# Altium PCB slip-rings.PcbDoc
Units mm, origin at the board's own origin, x right, y up, seen from the top; angles counter-clockwise.
Board outline 13.3 x 13.3 mm, 2 copper layers (Top Layer, Bottom Layer); 3 components, 3 nets, 4 pads, 12 vias.
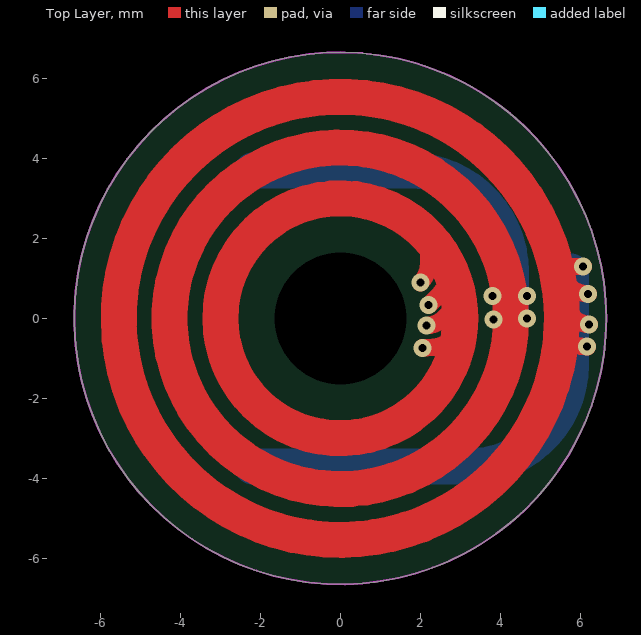
[diagram p0: Top Layer view]
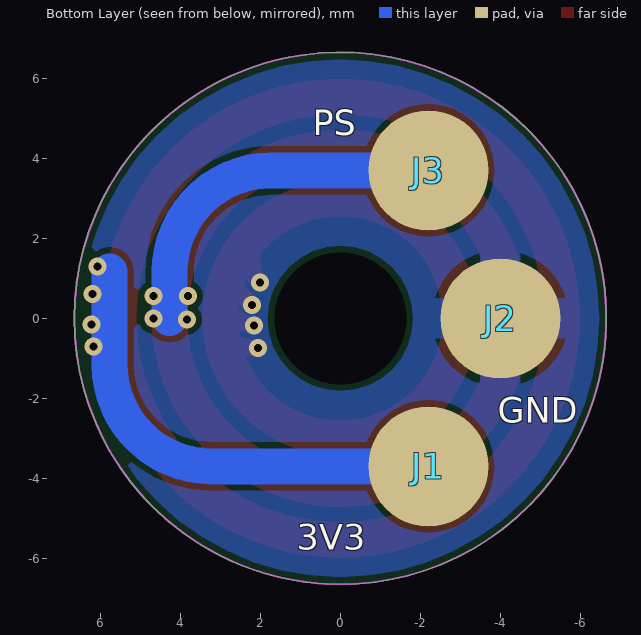
[diagram p1: Bottom Layer view, seen from below]

## Layer stack, top to bottom
Top Solder: solder mask 0.0102, Solder Resist, Dk 3.5
Top Layer: signal copper 0.0356
Dielectric 1: dielectric 0.32, FR-4, Dk 4.8
Bottom Layer: signal copper 0.0356
Bottom Solder: solder mask 0.0102, Solder Resist, Dk 3.5

## Board outline
-6.65,0 ccw(c0,0) 0,-6.65 ccw(c0,0) 6.65,0 ccw(c0,0) 0,6.65 ccw(c0,0)

## Design rules (kind name [scope] priority, off if disabled: settings)
Clearance [All] p1: gap=0.152 ignorepadtopadclearanceinfootprint=FALSE except(0: Arc-Hole Track-Hole SMDPad-Hole THPad-Hole Via-Hole Fill-Hole Poly-Hole Region-Hole Text-Hole)
HoleSize [All] p1: absolutevalues=TRUE maxlimit=25.4 minlimit=0.025 maxpercent=80.000 minpercent=20.000
MinimumSolderMaskSliver [All] p1 off: minsoldermaskwidth=0.254
PolygonConnect [All] p1: thpad.connectstyle=Direct thpad.reliefconductorwidth=0.254 thpad.reliefentries=4 thpad.polygonreliefangle="90 Angle" thpad.airgapwidth=0.254 smdpad.connectstyle=Relief smdpad.reliefconductorwidth=1.016 smdpad.reliefentries=4 smdpad.polygonreliefangle="90 Angle" smdpad.airgapwidth=0.203 via.connectstyle=Direct via.reliefconductorwidth=0.254 via.reliefentries=4 via.polygonreliefangle="90 Angle" via.airgapwidth=0.254
RoutingVias [All] p1: holewidth=0.711 width=1.27 viastyle="Through Hole" minholewidth=0.2 minwidth=0.45 maxholewidth=0.711 maxwidth=1.27
SilkToSilkClearance [All] p1 off: silktosilkclearance=0.254
SilkToSolderMaskClearance [IsPad] p1 off: minsilkscreentomaskgap=0.254 clearancetoexposedcopper=TRUE
SolderMaskExpansion [All] p1: expansion=0.102 istentingtop=FALSE
Width [All] p1: maxlimit=5.08 minlimit=0.152 preferedwidth=0.254 minimp=50.000000 maximp=50.000000 favimp=50.000000
26 further rules are at their usual default settings.

## Components (designator, comment, footprint, x,y, rotation, side; value= is the part's Value field where it differs from the comment)
J1 "pad single" PAD_SING#1 -2.2,-3.6 r0 top
J2 "pad single" PAD_SING#2 -4,0 r0 top
J3 "pad single" PAD_SING#2 -2.2,3.7 r0 top

## Footprints (in the part's own frame and the unit in brackets; to place one, negate y for a bottom-side part, rotate by r counter-clockwise, add the part's x,y. Pads: shape width x height; smd on the part's side, far side on the other; paste and mask are expansions set on the pad)
PAD_SING#1 [mm]
  round 3 smd far side: 1(0,-0.1)
PAD_SING#2 [mm]
  round 3 smd far side: 1(0,0)

## Part data
J1 J2 J3: library part PAD-SING

## Free pads (board coordinates)
  round 0 hole 3.3: 5(0,0)

## Via types
v1: diameter 0.45, hole 0.2, Top Layer to Bottom Layer, tented both sides, 12 vias

## Nets (pads, with @x,y where several pads share a name; then routed paths per layer and width w, separated by ;. In a path a pad name is that pad's centre, name@x,y a point inside that pad or via, vN(x,y) a via of type N, cw(c..) or ccw(c..) an arc to the next point about the centre after c; other vN are vias at no path point)
3V3: J1.1 | length 49.6
  Top Layer w0.254: 5.43,1.1 5.724,0.806 ; 5.54,0 5.855,0
  Top Layer w0.432: 5.43,1.1 cw(c5.901,0.629) 5.901,1.295 v1(6.071,1.295) ; 5.522,-0.45 ccw(c6.153,0.182) 6.153,-0.711 v1(6.172,-0.711) ; 5.724,0.806 ccw(c6.198,1.279) v1(6.198,0.61) ; 5.855,0 ccw(c6.223,0.368) v1(6.223,-0.152)
  Top Layer w0.9: 5.43,1.1 cw(c0,0) 5.54,0 cw(c0,0) 5.522,-0.45 cw(c0,0) 5.43,1.1
  Bottom Layer w0.9: J1.1 3.226,-3.7 ccw(c3.226,-1.16) 5.766,-1.16 5.766,1.168
GND: J2.1 | length 23.2
  Top Layer w0.432: v1(2.007,0.889) ccw(c1.526,1.369) 2.206,1.369 2.206,2.034 ; v1(2.057,-0.737) 2.153,-0.737 ccw(c2.153,0.425) 2.974,-0.396 ; v1(2.159,-0.178) ccw(c2.159,0.403) 2.569,-0.008 2.974,0.396 ; v1(2.21,0.33) 2.446,0.566 ccw(c1.764,1.248) 2.728,1.248
  Top Layer w0.9: 2.206,2.034 ccw(c0,0) 2.974,-0.396 ccw(c0,0) 3,0 ccw(c0,0) 2.974,0.396 ccw(c0,0) 2.206,2.034
TX: J3.1 | length 35.9
  Top Layer w0.9: 4.27,0 ccw(c0,0) 4.27,0
  Bottom Layer w0.9: J3.1 1.727,3.7 cw(c1.727,1.16) 4.267,1.16 4.267,0.003
  other v1: 3.835,-0.025 4.674,0 3.81,0.559 4.674,0.559

## Polygon pours and split planes (outlines as drawn)
GND on Bottom Layer "NONET_L-01_P-001" (solid, remove dead copper, pour order 0): -7.645,8.433 -7.645,-7.163 8.382,-7.163 8.382,8.433

## Keep-outs
Keep-Out Layer:
  circle w0.05: c0,0 r6.65

## Silkscreen, mask and mechanical layers (free items; w line width, h text height)
Bottom Overlay:
  text "PS" at 0.686,4.572 h0.64
  text "GND" at -3.937,-2.616 h0.64
  text "3V3" at 1.092,-5.791 h0.64
Top Solder:
  circle w0.9: c0,0 r5.54
  circle w0.9: c0,0 r4.27
  circle w0.9: c0,0 r3